# Altium PCB Extruder Fin.PcbDoc
Units mil, origin at the board's own origin, x right, y up, seen from the top; angles counter-clockwise.
Board outline 2250 x 1750 mil, 2 copper layers (Top Layer, Bottom Layer); 68 components, 54 nets, 272 pads, 62 vias.
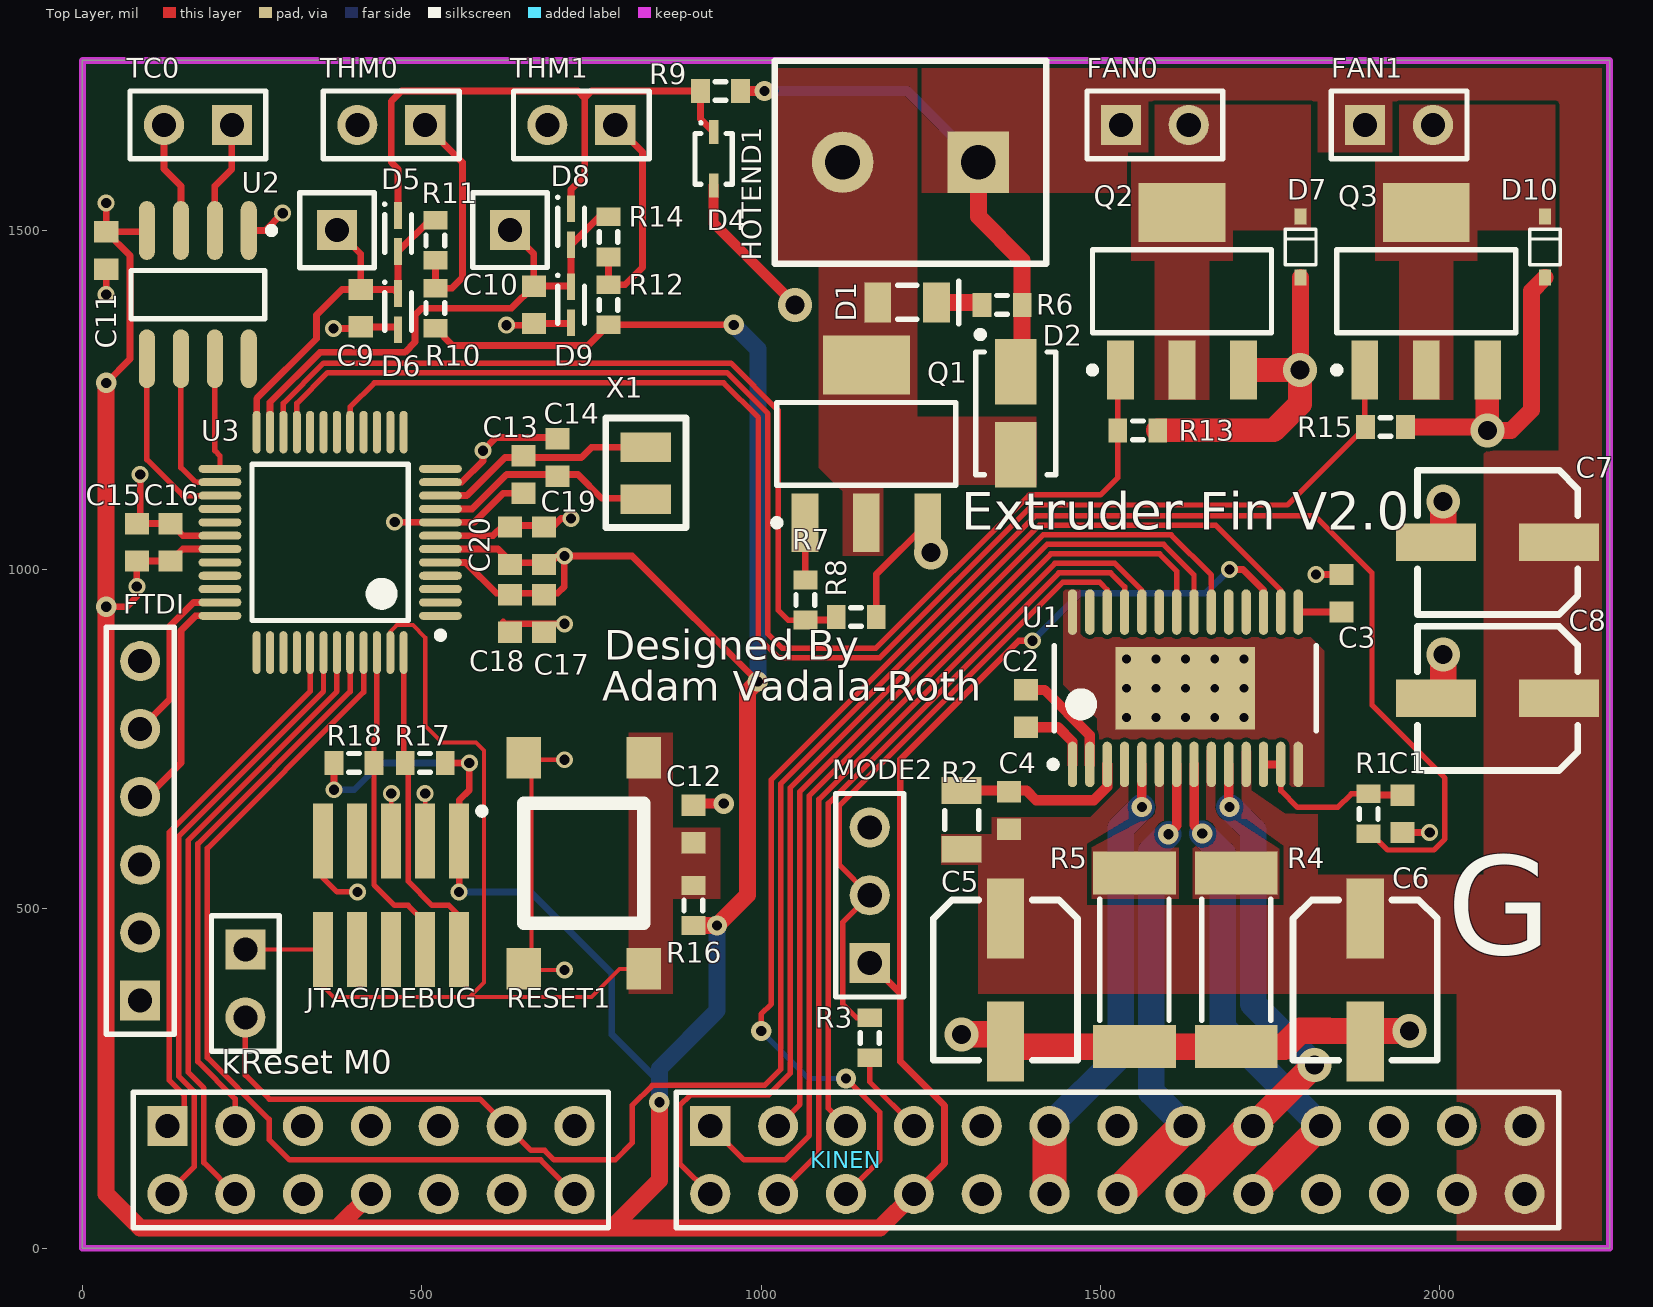
[diagram p0: Top Layer view]
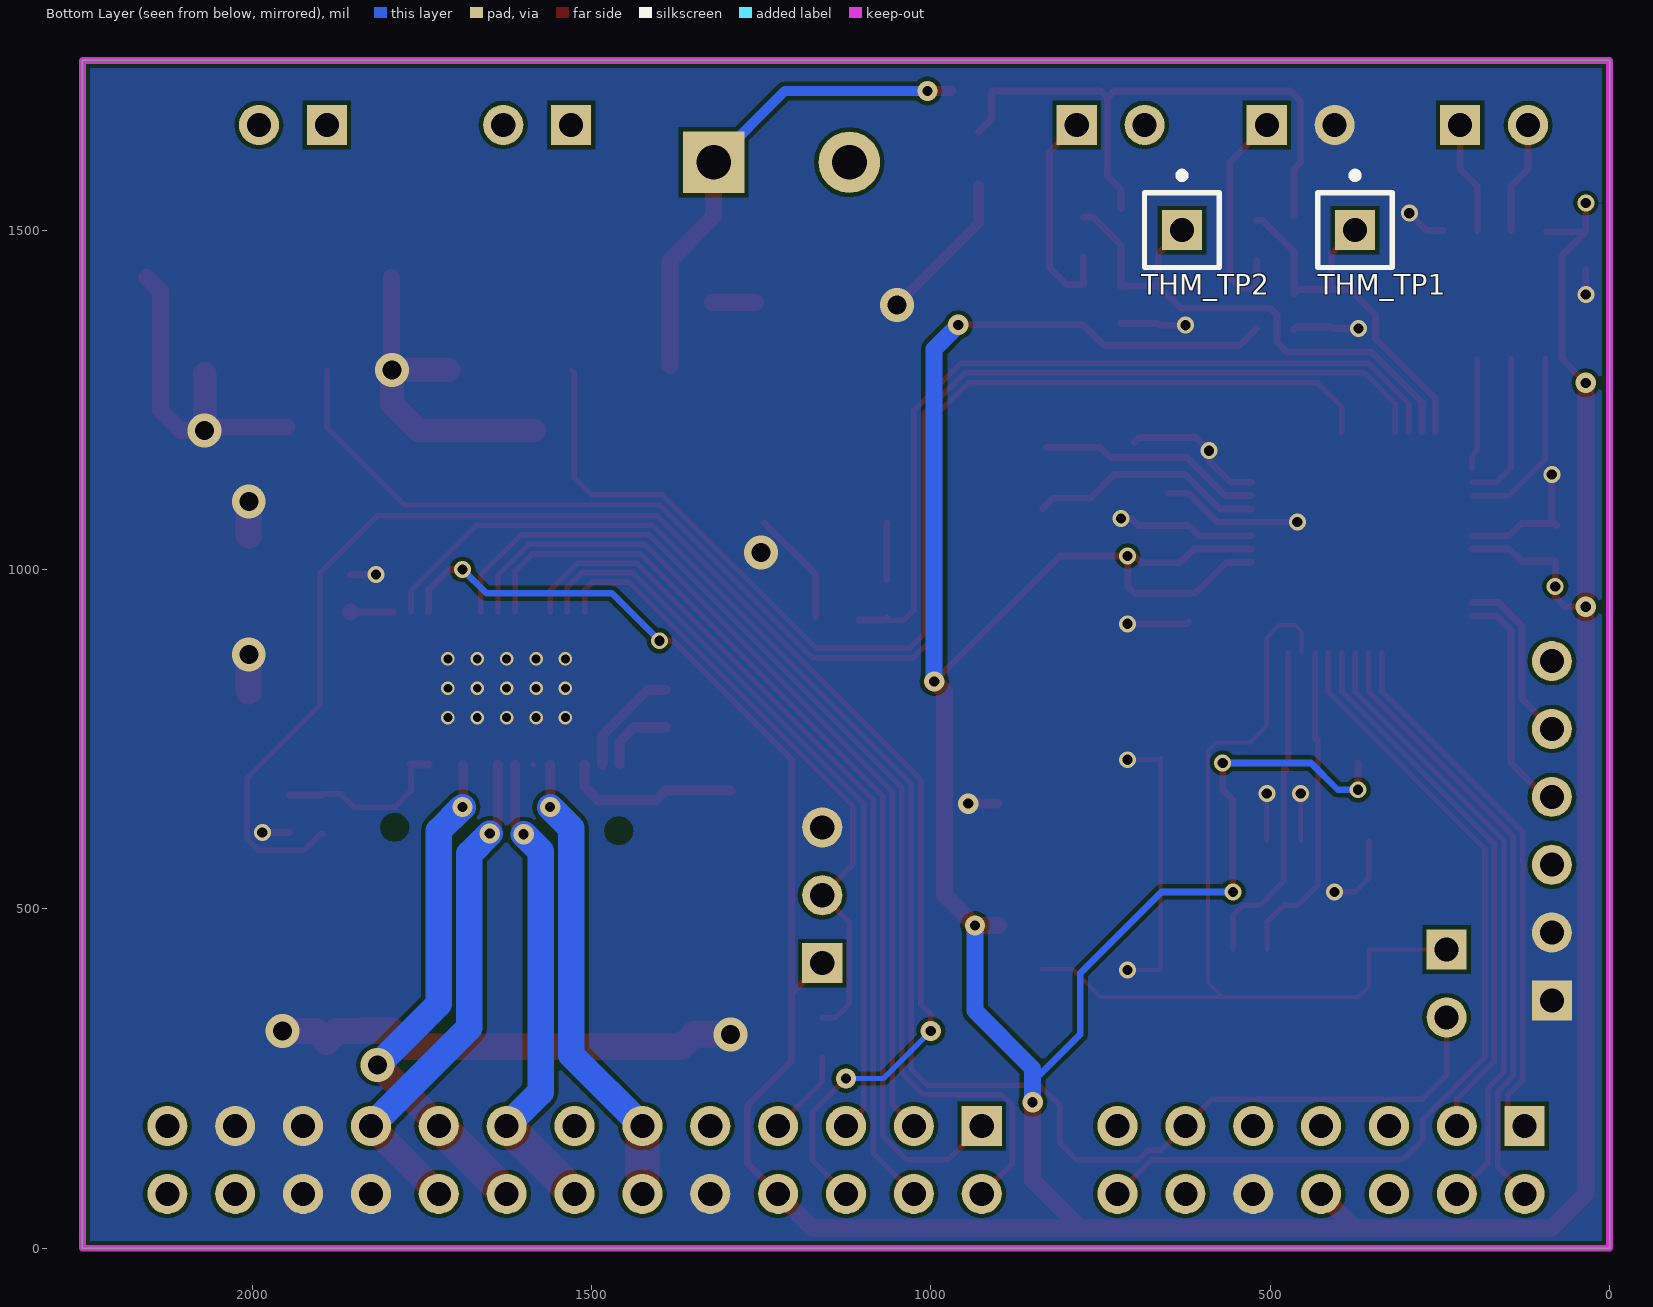
[diagram p1: Bottom Layer view, seen from below]

## Layer stack, top to bottom
Top Layer: signal copper 1.4
Dielectric: dielectric 12.6, FR-4, Dk 4.8
Bottom Layer: signal copper 1.4

## Board outline
0,0 0,1750 2250,1750 2250,0

## Design rules (kind name [scope] priority, off if disabled: settings)
Clearance [All] p1: gap=6
ComponentClearance [All] p1: gap=0 collisioncheckmode=3 verticalgap=10 showdistances=FALSE
FanoutControl Fanout_SOIC [(InComponent('U8') AND InComponent('U7'))] p3: bgadir=Out bgaviamode=Centered fanoutstyle=Staggered fanoutdirection=Alternating viagrid=1 // Fanout_SOIC (Default Rule)
FanoutControl Fanout_Small [All] p4: bgadir=Out bgaviamode=Centered fanoutstyle=Auto fanoutdirection=Alternating viagrid=1 // Fanout_Small (Default Rule)
HoleSize [All] p1: absolutevalues=TRUE maxlimit=120 minlimit=1 maxpercent=80.000 minpercent=20.000
MinimumSolderMaskSliver [All] p1 off: minsoldermaskwidth=10
PlaneConnect [All] p1: planeconnectstyle=Direct reliefexpansion=20 reliefentries=4 reliefconductorwidth=10 reliefairgap=10
PolygonConnect [All] p1: connectstyle=Direct reliefconductorwidth=45 reliefentries=4 polygonreliefangle="90 Angle" airgapwidth=10
RoutingVias [All] p1: holewidth=15 width=25 viastyle="Through Hole" minholewidth=15 minwidth=25 maxholewidth=28 maxwidth=50
SilkToSilkClearance [All] p1 off: silktosilkclearance=10
SilkToSolderMaskClearance SilkscreenOverComponentPads [IsPad] p1 off: minsilkscreentomaskgap=10 clearancetoexposedcopper=TRUE
SolderMaskExpansion [All] p1: expansion=4
Width [All] p1: maxlimit=200 minlimit=6 preferedwidth=6 minimp=50.000000 maximp=50.000000 favimp=50.000000
20 further rules are at their usual default settings.

## Classes and differential pairs
component class "Kinen Port": C7 C8 KINEN
component class "Fan FETs and Thermo": C9 C10 C11 D4 D5 D6 D7 D8 D9 D10 FAN0 FAN1 Q2 Q3 R9 R10 R11 R12 R13 R14 R15 TC0 THM0 THM1 THM_TP1 THM_TP2 U2
component class "Driver and FETs": 1 C1 C2 C3 C4 C5 C6 D1 D2 HOTEND1 MODE2 Q1 R1 R2 R3 R4 R5 R6 R7 R8 U1
component class "CM0 Controller FreeScale": C12 C13 C14 C15 C16 C17 C18 C19 C20 FTDI JTAG/DEBUG "kReset M0" R16 R17 R18 RESET1 U3 X1

## Components (designator, comment, footprint, x,y, rotation, side; value= is the part's Value field where it differs from the comment)
C1 "0603" 1608[0603] 1945,640 r90 top
C2 "0603" 1608[0603] 1390,795 r90 top
C3 "0603" 1608[0603] 1855,965 r270 top
C4 "0603" 1608[0603] 1365,645 r90 top
C5 "VS C" "Panasonic VS C" 1475,275 r90 top
C6 "VS C" "Panasonic VS C" 2005,275 r90 top
C7 "VS C" "Panasonic VS C" 1965,925 r0 top
C8 "VS C" "Panasonic VS C" 1965,695 r0 top
C9 "Cap Semi" 1608[0603] 410,1385 r90 top
C10 "Cap Semi" 1608[0603] 665,1390 r90 top
C11 "Cap Semi" 1608[0603] 35,1470 r90 top
C12 "0603" 1608[0603] 900,625 r90 top
C13 "0603" 1608[0603] 650,1140 r270 top
C14 "0603" 1608[0603] 700,1165 r90 top
C15 "0603" 1608[0603] 80,1040 r270 top
C16 "0603" 1608[0603] 130,1040 r270 top
C17 "0603" 1608[0603] 680,935 r90 top
C18 "0603" 1608[0603] 630,935 r90 top
C19 "0603" 1608[0603] 680,1035 r90 top
C20 "0603" 1608[0603] 630,1035 r90 top
D1 "LED1" "SM 0805 polarized" 1295,1350 r180 top
D2 "B240A-13-F" B240A-13-F 1375,1230 r90 top
D4 "SZMM3Z4V7T1G" SZMM3Z4V7T1G 930,1605 r90 top
D5 "Diode 1N4148" 1N4148WT 465,1495 r90 top
D6 "Diode 1N4148" 1N4148WT 465,1380 r90 top
D7 "PMEG1030EH_EJ" SOD-323 1795,1475 r270 top
D8 "Diode 1N4148" 1N4148WT 720,1505 r90 top
D9 "Diode 1N4148" 1N4148WT 720,1390 r90 top
D10 "PMEG1030EH_EJ" SOD-323 2155,1475 r270 top
FAN0 "Header 2" HDR1X2 1530,1655 r0 top
FAN1 "Header 2" HDR1X2 1890,1655 r0 top
FTDI "Header 6" HDR1X6 85,365 r90 top
HOTEND1 "OSTTC02216" OSTTC02216 1320,1600 r180 top
JTAG/DEBUG "ARM Cortex JTAG-DEBUG" FTSH-105-XX-X-DV 454.64,520 r0 top
KINEN "Kinen Device NEW" "Kinen Port - Device" 725,80 r90 top
"kReset M0" "Header 2" HDR1X2 240,440 r270 top
MODE2 "Header 3" HDR1X3 1160,420 r90 top
Q1 "FDT439N" "Fairchild FDT439N" 1155,1185 r90 top
Q2 "FDT439N" "Fairchild FDT439N" 1620,1410 r90 top
Q3 "FDT439N" "Fairchild FDT439N" 1980,1410 r90 top
R1 "0603" J1-0603 1895,640 r270 top
R2 "0805" "SM 0805 - gap trimmed" 1295,631.18 r90 top
R3 "0603" J1-0603 1160,310 r270 top
R4 "2512" Resistor2512 1700,425 r90 top
R5 "2512" Resistor2512 1550,425 r90 top
R6 "0603" J1-0603 1355,1390 r0 top
R7 "0603" J1-0603 1065,955 r90 top
R8 "0603" J1-0603 1140,930 r0 top
R9 "Res3" J1-0603 940,1705 r0 top
R10 "Res3" J1-0603 520,1385 r270 top
R11 "Res3" J1-0603 520,1485 r270 top
R12 "Res3" J1-0603 775,1390 r270 top
R13 "0603" J1-0603 1555,1205 r180 top
R14 "Res3" J1-0603 775,1490 r270 top
R15 "0603" J1-0603 1920,1210 r180 top
R16 "0603" J1-0603 900,505 r270 top
R17 "0603" J1-0603 505,715 r180 top
R18 "0603" J1-0603 400,715 r0 top
RESET1 "Tactile Switch" "Mountain Switch TS6324T1607" 650,695 r0 top
TC0 "Header 2" HDR1X2 220,1655 r180 top
THM0 "Header 2" HDR1X2 505,1655 r180 top
THM1 "Header 2" HDR1X2 785,1655 r180 top
THM_TP1 "TP4" PIN1 375,1500 r180 bottom
THM_TP2 "TP4" PIN1 630,1500 r180 bottom
U1 "DRV8825" DRV8825 1625,825 r90 top
U2 "MAX31855EASA+" MAXM-S8+4_N 170,1405 r270 top
U3 "MKL05Z32VLF4" MKL05Z32VLF4 365,1040 r180 top
X1 "ABS07-32.768KHZ-T" ABS07-32.768KHZ-T 830,1180 r270 top

## Footprints (in the part's own frame and the unit in brackets; to place one, negate y for a bottom-side part, rotate by r counter-clockwise, add the part's x,y. Pads: shape width x height; smd on the part's side, far side on the other; paste and mask are expansions set on the pad)
1N4148WT [mm] "Molded Diode, 2-Leads, Body 1.20x0.80mm, IPC Medium Density"
  rect 1x0.3 smd: 1(-0.675,0) 2(0.675,0)
  silkscreen extent -0.7,-0.5 1.15,0.55, body extent -0.65,-0.45 0.65,0.45, height 0.7
1608[0603] [mm] "Chip Capacitor, Body 1.6x0.8mm, IPC High Density"
  rect 0.8x0.9 smd: 1(-0.7,0) 2(0.7,0)
  body extent -0.87,-0.48 0.87,0.48, height 1.3
ABS07-32.768KHZ-T [mm] "ABS07-32.768KHZ-T Crystal Oscillator"
  rect 1.1x1.9 smd: 1(0,0) 2(1.95,0)
  silkscreen extent -1.1,-1.5 3,1.5
B240A-13-F [mm] "Molded Diode, 2-Leads, Body 4.30x2.60mm, IPC Medium Density"
  rect 2.45x1.55 smd: 1(-1.55,0) 2(1.55,0)
  silkscreen extent -2.3,-1.5 3.07,1.5, body extent -2.3,-1.46 2.3,1.46, height 2.3
DRV8825 [mm] "TSOP, 28-Leads, Body 9.70x4.40mm, Pitch 0.65mm, Thermal Pad 5.22.2x3.10.2mm, IPC Medium Density"
  oval 1.7x0.35 smd: 1(-2.85,4.225) 2(-2.85,3.575) 3(-2.85,2.925) 4(-2.85,2.275) 5(-2.85,1.625) 6(-2.85,0.975) 7(-2.85,0.325) 8(-2.85,-0.325) 9(-2.85,-0.975) 10(-2.85,-1.625) 11(-2.85,-2.275) 12(-2.85,-2.925) 13(-2.85,-3.575) 14(-2.85,-4.225) 15(2.85,-4.225) 16(2.85,-3.575) 17(2.85,-2.925) 18(2.85,-2.275) 19(2.85,-1.625) 20(2.85,-0.975) 21(2.85,-0.325) 22(2.85,0.325) 23(2.85,0.975) 24(2.85,1.625) 25(2.85,2.275) 26(2.85,2.925) 27(2.85,3.575) 28(2.85,4.225)
  rect 3.1x5.22 smd: 29(0,0)
  silkscreen extent -2.97,-4.9 1.6,5.07, body extent -2.25,-4.9 2.25,4.9, height 1.2
"Fairchild FDT439N" [mm] "SOT223, 4-Leads, Body 6.60x7.08mm (avg), Pitch 2.30mm, IPC Medium Density"
  rect 2.2x1 smd: 1(-2.95,2.3) 2(-2.95,0) 3(-2.95,-2.3)
  rect 2.2x3.25 smd: 2(2.95,0)
  silkscreen extent -3.07,-3.35 1.55,3.47, body extent -1.85,-3.35 1.85,3.35, height 1.6
FTSH-105-XX-X-DV [mm] "1.27mm pitch, 10 pin, terminal strip; vertical, SMT"
  rect 0.75x2.8 smd mask+0: 1(2.54,2.03) 2(2.54,-2.03) 3(1.27,2.03) 4(1.27,-2.03) 5(0,2.03) 6(0,-2.03) 7(-1.27,2.03) 8(-1.27,-2.03) 9(-2.54,2.03) 10(-2.54,-2.03)
  silkscreen extent 3.28,3.03 3.52,3.27
HDR1X2 [mm] "Connector; Header; 2 Position"
  rect 1.5x1.5 hole 0.9: 1(0,0)
  round 1.5 hole 0.9: 2(2.54,0)
  silkscreen extent -1.27,-1.27 3.81,1.27
HDR1X3 [mm] "Connector; Header; 3 Position"
  rect 1.5x1.5 hole 0.9: 1(0,0)
  round 1.5 hole 0.9: 2(2.54,0) 3(5.08,0)
  silkscreen extent -1.27,-1.27 6.35,1.27
HDR1X6 [mm] "Connector; Header; 6 Position"
  rect 1.5x1.5 hole 0.9: 1(0,0)
  round 1.5 hole 0.9: 2(2.54,0) 3(5.08,0) 4(7.62,0) 5(10.16,0) 6(12.7,0)
  silkscreen extent -1.27,-1.27 13.97,1.27
J1-0603 [mm] "Chip Resistor, Body 1.6x0.8mm, IPC High Density"
  rect 0.7x0.9 smd: 1(-0.75,0) 2(0.75,0)
  silkscreen extent -0.2,-0.35 0.2,0.35, body extent -0.85,-0.48 0.85,0.48, height 0.9
"Kinen Port - Device" [mm] "Synthetos Kinen Expansion Port Socket"
  rect 1.5x1.5 hole 0.9: 1(2.54,15.24) 15(2.54,-5.08)
  round 1.5 hole 0.9: 2(0,15.24) 3(2.54,12.7) 4(0,12.7) 5(2.54,10.16) 6(0,10.16) 7(2.54,7.62) 8(0,7.62) 9(2.54,5.08) 10(0,5.08) 11(2.54,2.54) 12(0,2.54) 13(2.54,0) 14(0,0) 16(0,-5.08) 17(2.54,-7.62) 18(0,-7.62) 19(2.54,-10.16) 20(0,-10.16) 21(2.54,-12.7) 22(0,-12.7) 23(2.54,-15.24) 24(0,-15.24) 25(2.54,-17.78) 26(0,-17.78) 27(2.54,-20.32) 28(0,-20.32) 29(2.54,-22.86) 30(0,-22.86) 31(2.54,-25.4) 32(0,-25.4) 33(2.54,-27.94) 34(0,-27.94) 35(2.54,-30.48) 36(0,-30.48) 37(2.54,-33.02) 38(0,-33.02) 39(2.54,-35.56) 40(0,-35.56)
  silkscreen extent -1.27,-36.83 3.81,16.51
MAXM-S8+4_N [mm] "SOIC, 8-Leads, Body 4.9x3.9mm, Pitch 1.27mm, IPC Medium Density"
  oval 2.2x0.6 smd: 1(-2.4,1.905) 2(-2.4,0.635) 3(-2.4,-0.635) 4(-2.4,-1.905) 5(2.4,-1.905) 6(2.4,-0.635) 7(2.4,0.635) 8(2.4,1.905)
  silkscreen extent -2.52,-2.5 0.9,2.88, body extent -2,-2.5 2,2.5, height 1.75
MKL05Z32VLF4 [mm] "TSQFP, 48-Leads, Body 7.00x7.00mm, Pitch 0.50mm, IPC Medium Density"
  oval 1.6x0.3 smd: 1(-4.125,2.75) 2(-4.125,2.25) 3(-4.125,1.75) 4(-4.125,1.25) 5(-4.125,0.75) 6(-4.125,0.25) 7(-4.125,-0.25) 8(-4.125,-0.75) 9(-4.125,-1.25) 10(-4.125,-1.75) 11(-4.125,-2.25) 12(-4.125,-2.75) 25(4.125,-2.75) 26(4.125,-2.25) 27(4.125,-1.75) 28(4.125,-1.25) 29(4.125,-0.75) 30(4.125,-0.25) 31(4.125,0.25) 32(4.125,0.75) 33(4.125,1.25) 34(4.125,1.75) 35(4.125,2.25) 36(4.125,2.75)
  oval 0.3x1.6 smd: 13(-2.75,-4.125) 14(-2.25,-4.125) 15(-1.75,-4.125) 16(-1.25,-4.125) 17(-0.75,-4.125) 18(-0.25,-4.125) 19(0.25,-4.125) 20(0.75,-4.125) 21(1.25,-4.125) 22(1.75,-4.125) 23(2.25,-4.125) 24(2.75,-4.125) 37(2.75,4.125) 38(2.25,4.125) 39(1.75,4.125) 40(1.25,4.125) 41(0.75,4.125) 42(0.25,4.125) 43(-0.25,4.125) 44(-0.75,4.125) 45(-1.25,4.125) 46(-1.75,4.125) 47(-2.25,4.125) 48(-2.75,4.125)
  silkscreen extent -4.25,-2.93 2.93,3.6, body extent -3.5,-3.5 3.5,3.5, height 1.6
"Mountain Switch TS6324T1607" [mm]
  rect 1.3x1.55 smd: 1(0,-7.2) 1(0,0.7) 2(4.5,-7.2) 2(4.5,0.7)
  silkscreen extent 0,-5.5 4.5,-1
OSTTC02216 [mm] "Screw Terminal 5.08mm spacing"
  rect 2.3x2.3 hole 1.3: 1(0,0)
  round 2.3 hole 1.3: 2(5.08,0)
  silkscreen extent -2.54,-3.8 7.62,3.8
"Panasonic VS C" [mm]
  rect 3x1.4 smd: 1(5.348,2.921) 2(0.748,2.921)
  silkscreen extent 0.05,0.22 6.05,5.62
PIN1 [mm] "Connector; Plug"
  rect 1.5x1.5 hole 0.9: 1(0,0)
  silkscreen extent -1.4,-1.4 1.4,2.17
Resistor2512 [mm] "resistor 2512 reflow soldering"
  rect 1.6x3.1 smd: 1(-3.25,0) 2(3.25,0)
  silkscreen extent -2.26,-1.3 2.26,1.3, body extent -3.24,-1.4 3.24,1.4, height 0.9
"SM 0805 - gap trimmed" [mm]
  rect 1x1.5 smd: 1(-1.1,0) 2(1.1,0)
  silkscreen extent -0.36,-0.64 0.35,0.63
"SM 0805 polarized" [mm]
  rect 1x1.5 smd: 1(0.93,-1.105) 2(3.13,-1.105)
  silkscreen extent 0.1,-1.9 2.38,-0.3
SOD-323 [mm]
  rect 0.6x0.45 smd: 1(1.143,0) 2(-1.143,0)
  silkscreen extent -0.67,-0.57 0.67,0.57
SZMM3Z4V7T1G [mm] "Molded Diode, 2-Leads, Body 1.70x1.25mm, IPC Medium Density"
  rect 0.9x0.35 smd: 1(-1,0) 2(1,0)
  silkscreen extent -0.95,-0.7 1.4,0.7, body extent -0.9,-0.67 0.9,0.67, height 1

## Part data
C1 C2 C3 C4 C12 C13 C14 C15 C16 C17 C18 C19 C20: library part "Cap Semi", "Capacitor (Semiconductor SIM Model)"
C5 C6 C7 C8: library part "Cap Pol1", "Polarized Capacitor (Radial)"
C9 C10 C11: "Capacitor (Semiconductor SIM Model)"
D1: "Typical RED GaAs LED"
D2: library part "D Schottky", "Schottky Diode"
D4: library part "D Zener", "Zener Diode"
D5 D6 D8 D9: "High Conductance Fast Diode"
D7 D10: library part Diode, "Default Diode"
FAN0 FAN1 "kReset M0" TC0 THM0 THM1: "Header, 2-Pin"
FTDI: "Header, 6-Pin"
HOTEND1: library part "Pheonix Contact 2X1"
JTAG/DEBUG: library part "ARM Cortex JTAG-DEBUG Header"
MODE2: "Header, 3-Pin"
Q1 Q2 Q3: library part "Fairchild FDT439N", "N-Channel MOSFET"
R1 R2 R3 R4 R5 R6 R7 R8 R13 R15 R16 R17 R18: library part Res3, "Resistor"
R9 R10 R11 R12 R14: "Resistor"
THM_TP1 THM_TP2: library part Socket, "Socket"
U1: "DRV8825 Ti Stepper Driver"
U2: "Cold Junction Compensated Thermocouple to Digital Converter, 14 Bits Temperature Resolution, -40 to 125 degC, 8-Pin SOIC (S8+4), Pb-Free"
U3: "ARM Cortex M0+"
X1: "ABS07-32.768KHZ-T RTC Crystal Oscillator"

## Via types
v1: diameter 25, hole 15, Top Layer to Bottom Layer, 24 vias
v2: diameter 20, hole 13, Top Layer to Bottom Layer, 15 vias
v3: diameter 30, hole 15, Top Layer to Bottom Layer, 14 vias
v4: diameter 50, hole 28, Top Layer to Bottom Layer, 9 vias

## Nets (pads, with @x,y where several pads share a name; then routed paths per layer and width w, separated by ;. In a path a pad name is that pad's centre, name@x,y a point inside that pad or via, vN(x,y) a via of type N, cw(c..) or ccw(c..) an arc to the next point about the centre after c; other vN are vias at no path point)
2: 
3.3VCC: C11.2 C15.2 C16.2 C17.2 C18.2 C19.1 C20.1 JTAG/DEBUG.1 KINEN.8 KINEN.22 MODE2.1 R10.2 R12.2 R16.2 R17.1 R18.1 U1.17 U2.4 U3.5 U3.6 U3.31 | length 8218.5
  Top Layer w10: v3(35,945) 65,945 80,960 v1(80,975) C15.2@80,1012.56 ; v3(35,1275) 70,1310 70,1462.56 C11.2 ; v1(35,1540) C11.2 ; C15.2 C16.2 147.72,1030.16 U3.31 ; U2.4@93.07,1497.56 C11.2 ; v1(370.47,675.47) R18.1 ; R10.2 545.47,1330 744.53,1330 R12.2 v3(959.53,1360.47) ; U3.5 564.53,1010.47 610,965 700,965 710,975 v1(710,1020) ; U3.6 612.28,1030.16 632.44,1010 690,1010 700,1020 v1(710,1020) ; R17.1 v1(570,715) 570,675 555,660 v1(555,525) ; v3(995,835) 810,1020 v1(710,1020) ; MODE2.1 1205,375 ; KINEN.22 1270,125 1270,210 1205,275 1205,375 ; v1(1400,895) 1379.57,895 1205,720.43 1205,375 ; v1(1690,1000) 1710,1000 1740.16,969.84 U1.17
  Top Layer w25: v3(35,1275) v3(35,945) 35,80 85,30 375,30 KINEN.8 ; 380,30 780,30 ; v3(850,215) 850,100 780,30 ; R16.2 v3(934.88,475.47) 980,520.59 980,820 v3(995,835) ; KINEN.22 1175,30 780,30
  Bottom Layer w10: v1(370.47,675.47) 400.47,675.47 440,715 v1(570,715) ; v1@550,525 v1(555,525) 660,525 780,405 780,315 850,245 ; 994.88,1325.12 995,1325 ; v1(1400,895) 1470,965 1655,965 v1(1690,1000)
  Bottom Layer w25: v3(850,215) 850,245 850,265 934.88,349.88 v3(934.88,475.47) ; v3(959.53,1360.47) 994.88,1325.12 ; v3(995,835) 995,1325
24VCC: C4.1 C5.1 C6.1 C7.1 C8.1 D2.2 FAN0.1 FAN1.1 HOTEND1.1 KINEN.38 KINEN.39 KINEN.40 R2.1 R6.2 R9.2 U1.4 U1.11 | length 720.1
  Top Layer w15: R9.2 v3(1005,1705)
  Top Layer w25: HOTEND1.1 1320,1520 1384.53,1455.47 R6.2 D2.2@1384.53,1300.55
  Bottom Layer w15: v3(1005,1705) 1215,1705 HOTEND1.1
AOUT1: KINEN.25 KINEN.26 U1.5 | length 689.1
  Top Layer w14: v3(1561.02,650) U1.5
  Top Layer w50: KINEN.26 KINEN.25
  Bottom Layer w39: KINEN.25 1530,285 1530,618.98 v3(1561.02,650)
AOUT2: KINEN.28 KINEN.29 U1.7 | length 710.3
  Top Layer w14: v3(1600,610) 1612.2,622.2 U1.7
  Top Layer w50: KINEN.28 KINEN.29
  Bottom Layer w39: v3(1600,610) 1575,585 1575,230 KINEN.29
BOUT1: KINEN.30 KINEN.31 U1.10 | length 763.1
  Top Layer w14: v3@1688,652 v3(1690,650) ; v3@1688.98,652.98 U1.10
  Top Layer w39: KINEN.31 v4(1815,270)
  Top Layer w50: KINEN.30 KINEN.31
  Bottom Layer w39: v3(1690,650) 1725,615 1725,360 v4(1815,270)
BOUT2: KINEN.32 KINEN.33 U1.8 | length 751.8
  Top Layer w14: U1.8 1637.8,623.23 v3(1650,611.02)
  Top Layer w39: KINEN.32 KINEN.33
  Bottom Layer w39: v3(1650,611.02) 1680,581.02 1680,325 KINEN.33
DIR: KINEN.16 U1.20 | length 1605.8
  Top Layer w8: KINEN.16 880,125 880,210 896,226 1011,226 1043,258 1043,678.64 1415.36,1051 1604,1051 1663.39,991.61 U1.20
DRV_VREF: KINEN.20 R1.2 | length 2388.3
  Top Layer w8: v3(1000,320) 1000,345 1015,360 1015,690.24 1403.76,1079 1816.17,1079 1900,995.17 1900,800 2007.5,692.5 2007.5,603.12 1991.07,586.69 1923.14,586.69 1899.36,610.47 R1.2 ; KINEN.20 1175,130 1175,200 v3(1125,250)
  Bottom Layer w8: v3(1000,320) 1070,250 v3(1125,250)
FAN0_PWM: Q2.1 R13.2 U3.21 | length 1893.3
  Top Layer w8: U3.21 315.79,1244.78 361.01,1290 949.6,1290 1010,1229.6 1010,905 1031,884 1169.17,884 1395.17,1110 1500,1110 1525.47,1135.47 R13.2 1525.47,1289.88 Q2.1
FAN1_PWM: Q3.1 R15.2 U3.17 | length 2130.8
  Top Layer w8: U3.17 394.53,1239.53 430,1275 944.8,1275 996,1223.8 996,899.2 1025.2,870 1174.96,870 1399.96,1095 1775.47,1095 R15.2 1889.45,1211.02 Q3.1
FAN_FET0: D7.2 FAN0.2 Q2.2
FAN_FET1: D10.2 FAN1.2 Q3.2
FET_PGND: D1.2 D2.1 HOTEND1.2 Q1.2
FTDI_RX: FTDI.4 U3.36 | length 342.3
  Top Layer w10: FTDI.4 95,665 145,715 145,910 166.73,931.73 U3.36
FTDI_TX: FTDI.5 U3.35 | length 257.9
  Top Layer w10: FTDI.5 129,809 129,916.63 163.79,951.42 U3.35
GND: C1.1 C3.1 C5.2 C6.2 C7.2 C8.2 C9.1 C10.1 C11.1 C12.2 C13.2 C14.2 C15.1 C16.1 C17.1 C18.1 C19.2 C20.2 D4.1 D6.1 D7.1 D9.1 D10.1 FTDI.1 FTDI.2 JTAG/DEBUG.3 JTAG/DEBUG.5 JTAG/DEBUG.9 KINEN.10 KINEN.24 KINEN.34 KINEN.35 KINEN.36 KINEN.37 MODE2.3 Q1.3 Q2.3 Q3.3 R4.1 R5.1 R8.2 R13.1 R15.1 RESET1.1 THM0.2 U1.14 U1.28 U1.29 U2.1 U3.7 U3.8 U3.11 U3.30 | length 4140.2
  Top Layer w6: JTAG/DEBUG.5 455,600.28 v1(455,670) ; JTAG/DEBUG.3 505,600.28 v1(505,670) ; RESET1.1@660,722.2 RESET1.1@661.54,720.67 ; RESET1.1@661.54,719.64 661.54,409.64 v1(710,409.64) ; RESET1.1@662.56,719.64 v1(710,719.64)
  Top Layer w8: JTAG/DEBUG.9 354.64,545.36 375,525 v1(405,525) ; v4(1793.86,1293.86) v4@1795,1295
  Top Layer w10: v1(35,1405) C11.1 ; C15.1@77.44,1065 C15.1 ; C15.1@85,1067.56 C16.1 147.72,1049.84 U3.30 ; C15.1@85,1072.56 v1(85,1140) ; U2.1 269.49,1499.49 v1(295,1525) ; v1(370,1355) 407.56,1355 C9.1 460.98,1357.44 D6.1 ; v1(460,1070) 460.47,1069.53 U3.8 577.15,1069.53 620.07,1112.44 C13.2 ; U3.7 604.84,1049.84 620,1065 695,1065 705,1075 v1(720,1075) ; U3.11 558.58,1128.58 590,1160 v1(590,1175) 609.31,1194.31 693.25,1194.31 C14.2@700,1187.56 ; C18.1@620,922.44 622.44,920 v1(710,920) ; v1(625,1360) 662.56,1360 C10.1 719.02,1362.44 D9.1 ; R8.2 1169.53,992.83 Q1.3 ; v1(1817.56,992.56) C3.1 ; C1.1 v1(1985,612.44)
  Top Layer w15: C12.2@902.44,655 v3(945,655) ; D4.1 930,1510 v4(1050,1390)
  Top Layer w25: v4@1795,1295 D7.1 ; R15.1 v4@2065,1210 ; v4(2070,1205) 2105,1205 2135,1235 2135,1410 D10.1
  Top Layer w35: R13.1 1755,1205 1793.86,1243.86 v4(1793.86,1293.86) Q2.3 ; v4@2065,1210 v4(2070,1205) Q3.3@2070,1288.31
  Top Layer w39: v4(1295,315) C5.2@1349.45,315 ; C5.2 1367.4,297.05 R5.1 R4.1 1770.63,297.05 1794.08,320.5 1835.92,320.5 1836.42,320 1874.45,320 C6.2 1905.55,320 v4(1955,320) ; C8.2@2005,820.55 v4(2005,875) ; C7.2@2005,1050.55 v4(2005,1100)
  other v2: 1538.39,781.69 1581.69,781.69 1625,781.69 1668.31,781.69 1711.61,781.69 1538.39,825 1581.69,825 1625,825 1668.31,825 1711.61,825 1538.39,868.31 1581.69,868.31 1625,868.31 1668.31,868.31 1711.61,868.31
  other v4: 1250,1025
HOTEND_PWM: R7.1 R8.1 U3.22 | length 1210.2
  Top Layer w8: U3.22 296.1,1244.89 355.21,1304 955.4,1304 1025,1234.4 1025,940 1039.53,925.47 R7.1
  Top Layer w10: R7.1@1065,929.61 R7.1 R8.1@1105.94,925.47
KINEN_RESET: "kReset M0.2" KINEN.11 U1.16 | length 2400.4
  Top Layer w8: 240,340 240,255 275.47,219.53 585.47,219.53 KINEN.11 661,144 681,144 695,130 785,130 810,155 810,210.36 839.64,240 1005.2,240 1029,263.8 1029,684.44 1409.56,1065 1670,1065 1765.75,969.25 U1.16
M0+_RESET: "kReset M0.1" C12.1 JTAG/DEBUG.10 R16.1 RESET1.2 U3.47 | length 1373
  Top Layer w6: 240,440 JTAG/DEBUG.10@354.56,440 ; JTAG/DEBUG.10@354.64,440 354.64,385.36 370,370 570,370 ; U3.47 453.58,908.58 463.09,918.09 486.91,918.09 505,900 505,770 530,745 580,745 591.5,733.5 591.5,391.5 570,370 ; RESET1.2@837.17,411.18 791.18,411.18 750,370 570,370
M0_SS: KINEN.1 U3.41 | length 803
  Top Layer w8: KINEN.1 150,205 150,225.2 128,247.2 128,613 335.47,820.47 U3.41
MODE0: KINEN.18 U1.24 | length 1274.5
  Top Layer w8: KINEN.18 1085,140 1085,661.24 1432.76,1009 1521,1009 1561.02,968.98 U1.24
MODE1: KINEN.19 U1.25 | length 1109
  Top Layer w8: KINEN.19 1099,206 1099,655.44 1438.56,995 1514.8,995 1535.43,974.37 U1.25
MODE2: MODE2.2 R3.1 U1.26 | length 944
  Top Layer w8: R3.1 1140.47,339.53 1120,360 1120,480 MODE2.2 1115,565 1115,651.64 1444.36,981 1499,981 1509.84,970.16 U1.26
NENBL: KINEN.17 U1.21 | length 1311.3
  Top Layer w8: KINEN.17 1057,212 1057,672.84 1421.16,1037 1593,1037 1637.8,992.2 U1.21
NetC2_1: C2.1 U1.1 | length 110.9
  Top Layer w15: C2.1 1437.56,767.44 1458.66,746.34 U1.1
NetC2_2: C2.2 U1.2 | length 164.9
  Top Layer w15: C2.2 1417.44,822.56 1484.25,755.75 U1.2
NetC3_2: C3.2 U1.15 | length 63.8
  Top Layer w10: U1.15 C3.2@1854.76,937.2
  Top Layer w25: C3.2@1854.76,937.2 C3.2
NetC4_2: C4.2 R2.2 U1.3 | length 262
  Top Layer w15: R2.2 1390.47,674.53 1405,660 1490,660 1509.84,679.84 U1.3
NetC9_2: C9.2 D5.1 D6.2 R11.1 THM_TP1.1 U3.24 | length 585.1
  Top Layer w10: U3.24 256.73,1251.73 345,1340 345,1375 382.56,1412.56 C9.2 ; THM_TP1.1 410,1465 C9.2 ; R11.1 511.1,1514.53 D5.1 D6.2 459.02,1412.56 C9.2
NetC10_2: C10.2 D8.1 D9.2 R14.1 THM_TP2.1 U3.23 | length 813.1
  Top Layer w10: U3.23 276.42,1246.42 350,1320 475,1320 490,1335 490,1375 500,1385 632.44,1385 C10.2 ; THM_TP2.1 665,1465 C10.2 ; R14.1 761.1,1519.53 D8.1 D9.2 719.02,1417.56 C10.2
NetC13_1: C13.1 U3.10 X1.1 | length 332
  Top Layer w10: U3.10 566.27,1108.9 622.37,1165 735,1165 750,1180 X1.1
NetC14_1: C14.1 U3.9 X1.2 | length 349.3
  Top Layer w10: U3.9 574.21,1089.21 625,1140 730,1140 765,1105 820,1105 X1.2@835,1090
NetD1_1: D1.1 R6.1 | length 63.6
  Top Layer w25: D1.1 R6.1@1321.97,1393.5
NetD4_2: D4.2 D5.2 D8.2 R9.1 | length 883
  Top Layer w10: D5.2 465,1590 455,1600 455,1690 470,1705 730,1705 740,1695 ; D8.2 720,1560 740,1580 740,1695 ; D4.2 910.47,1663.9 R9.1 750,1705 740,1695
NetJTAG/DEBUG_2: JTAG/DEBUG.2 R17.2 U3.48 | length 489
  Top Layer w8: R17.2@473.27,715 U3.48 ; R17.2@475.47,705 R17.2@479.88,700.59 ; R17.2@479.88,715 479.88,540.66 515.34,505.2 539.8,505.2 554.64,490.36 JTAG/DEBUG.2
NetJTAG/DEBUG_4: JTAG/DEBUG.4 R18.2 U3.46 | length 480.3
  Top Layer w8: 429.53,750 429.53,535.47 459.8,505.2 479.8,505.2 504.64,480.36 JTAG/DEBUG.4 ; 433.9,750 U3.46
NetKINEN_14: KINEN.14 U3.45 | length 1333.8
  Top Layer w8: U3.45 414.21,819.21 184,589 184,280.8 275,189.8 275,160 305,130 675,130 KINEN.14
NetKINEN_21: KINEN.21 R3.2 | length 127.4
  Top Layer w8: R3.2 1160,245 KINEN.21
NetQ1_1: Q1.1 R7.2 | length 84.6
  Top Layer w10: Q1.1 1065,1068.31 R7.2
NetR4_2: R4.2 U1.9
NetR5_2: R5.2 U1.6 | length 0.8
  Top Layer w8: U1.6@1586.02,712.21 U1.6
NetR10_1: R10.1 R11.2 THM0.1 | length 335.1
  Top Layer w10: THM0.1 560,1600 560,1430 544.53,1414.53 R10.1 R11.2
NetR12_1: R12.1 R14.2 THM1.1 | length 328.1
  Top Layer w10: R14.2 R12.1 799.53,1419.53 825,1445 825,1615 THM1.1
NetTC0_1: TC0.1 U2.2 | length 165.9
  Top Layer w10: U2.2 195,1565 220,1590 TC0.1
NetTC0_2: TC0.2 U2.3 | length 165.9
  Top Layer w10: TC0.2 120,1590 145,1565 U2.3
NetU2_5: U2.5 U3.27 | length 278.2
  Top Layer w8: U2.5 95,1161.82 147.92,1108.9 U3.27
NetU2_6: U2.6 U3.26 | length 227
  Top Layer w8: U2.6 145,1150 166.42,1128.58 U3.26
NetU2_7: U2.7 U3.25 | length 165.4
  Top Layer w8: U2.7 195,1175 202.6,1167.4 U3.25
SPI0_MISO: KINEN.4 U3.43 | length 916.8
  Top Layer w8: KINEN.4 179,126 179,235.8 156,258.8 156,601.4 374.84,820.24 U3.43
SPI0_MOSI: KINEN.2 U3.42 | length 912
  Top Layer w8: KINEN.2 165,120 165,230 142,253 142,607.2 355.16,820.36 U3.42
SPI0_SCLK: KINEN.3 U3.44 | length 813.4
  Top Layer w8: KINEN.3 225,220 170,275 170,595.6 394.53,820.13 U3.44
STEP: KINEN.15 U1.22 | length 1442.3
  Top Layer w8: KINEN.15 975,130 1035,130 1071,166 1071,667.04 1426.96,1023 1587,1023 1612.2,997.8 U1.22
VREF: C1.2 R1.1 U1.12 U1.13 | length 260
  Top Layer w8: U1.13 1765.75,674.25 1790.5,649.5 1849.5,649.5 1869.53,669.53 R1.1
  Top Layer w10: R1.1@1896.97,667.56 C1.2
  Top Layer w12: U1.12 U1.13
pads on no net: FTDI.3 FTDI.6 JTAG/DEBUG.6 JTAG/DEBUG.7 JTAG/DEBUG.8 KINEN.5 KINEN.6 KINEN.7 KINEN.9 KINEN.12 KINEN.13 KINEN.23 KINEN.27 THM1.2 U1.18 U1.19 U1.23 U1.27 U2.8 U3.1 U3.2 U3.3 U3.4 U3.12 U3.13 U3.14 U3.15 U3.16 U3.18 U3.19 U3.20 U3.28 U3.29 U3.32 U3.33 U3.34 U3.37 U3.38 U3.39 U3.40

## Polygon pours and split planes (outlines as drawn)
24VCC on Top Layer "Mechanical 15-No Net" (solid, remove dead copper, pour order 16): 2025,0 2250,0 2250,1750.71 1230,1750 1230,1555 1540,1555 1540,1615 1570,1615 1570,1690 1820,1690 1820,1615 1930,1615 1930,1690 2175,1690 2175,1175 2065,1175 2065,550 1820,550 1820,640 1772,640 1722,675 1722,733 1708,733 1708,633 1715,633 1770,593 1770,505 1480,505 1480,596 1539,631 1541,632 1541,741 1529,741 1529,679 1485,635 1340,635 1340,610 1265,610 1265,565 1320,565 1320,375 2025,375
NetR4_2 on Top Layer "Mechanical 15-No Net" (solid, remove dead copper, pour order 12): 1764,515 1636.28,515 1636.28,600 1656,600 1656,734 1669,734 1669,650 1764,588
NetR5_2 on Top Layer "Mechanical 15-No Net" (solid, remove dead copper, pour order 11): 1487,515 1615,515 1615,590 1593,590 1593,624.96 1593.01,731 1581,731 1581,640 1487,591
FET_PGND on Top Layer "Mechanical 15-No Net" (solid, remove dead copper, pour order 13): 1020,1750 1020,1450 1085,1450 1085,1225 1085,1150 1115,1120 1120,1115 1120,1020 1180,1020 1180,1090 1180,1125 1405,1125 1405,1225 1230,1225 1230,1750
M0+_RESET on Top Layer "Mechanical 15-No Net" (solid, remove dead copper, pour order 10): 870,374.64 805,374.64 805,404.64 805,759.64 870,759.64 870,619.64 905,619.64 940,619.64 940,514.64 870,514.64 870,374.64
GND on Top Layer "Mechanical 15-No Net" (solid, remove dead copper, pour order 18): 1445,970 1470,970 1470,905 1475,900 1610,900 1810,900 1825,885 1830,880 1830,680 1780,680 1775,680 1775,750 1610,750 1495,750 1495,780 1485,790 1445,830 1445,970
FAN_FET0 on Top Layer "Mechanical 15-No Net" (solid, remove dead copper, pour order 15): 1580,1685 1580,1605 1545,1605 1545,1455 1580,1455 1580,1250 1660,1250 1660,1455 1695,1455 1695,1500 1810,1500 1810,1685
FAN_FET1 on Top Layer "Mechanical 15-No Net" (solid, remove dead copper, pour order 14): 1940,1685 1940,1605 1905,1605 1905,1455 1940,1455 1940,1250 2020,1250 2020,1455 2055,1455 2055,1500 2170,1500 2170,1685
GND on Bottom Layer "Mechanical 15-No Net" (solid, remove dead copper, pour order 17): 0,0 0,1750 2250,1750 2250,0

## Keep-outs
Keep-Out Layer:
  the board outline again, w10

## Silkscreen, mask and mechanical layers (free items; w line width, h text height)
Top Overlay:
  lines w8: 319.88,1444.88 319.88,1554.88 429.88,1554.88 429.88,1444.88 319.88,1444.88 ; 575,1445 685,1445 685,1555 575,1555 575,1445
  text "Extruder Fin V2.0" at 1295,1040 h95
  text "Designed By" at 769,852 h75
  text "Adam Vadala-Roth" at 766,792 h75
  text "G" at 2010,385 h250